# Altium PCB BASE.PcbDoc (part 4 of 5)
Units mil, origin at the board's own origin, x right, y up, seen from the top; angles counter-clockwise.
Board outline 4330.71 x 3937.01 mil, 6 copper layers (Top, GND1, SIG1, PWR, GND2, Bottom), stack 32.112 mil thick; 57 components, 250 nets, 665 pads, 350 vias.
Unrouted connection lines stored in the file: 2.
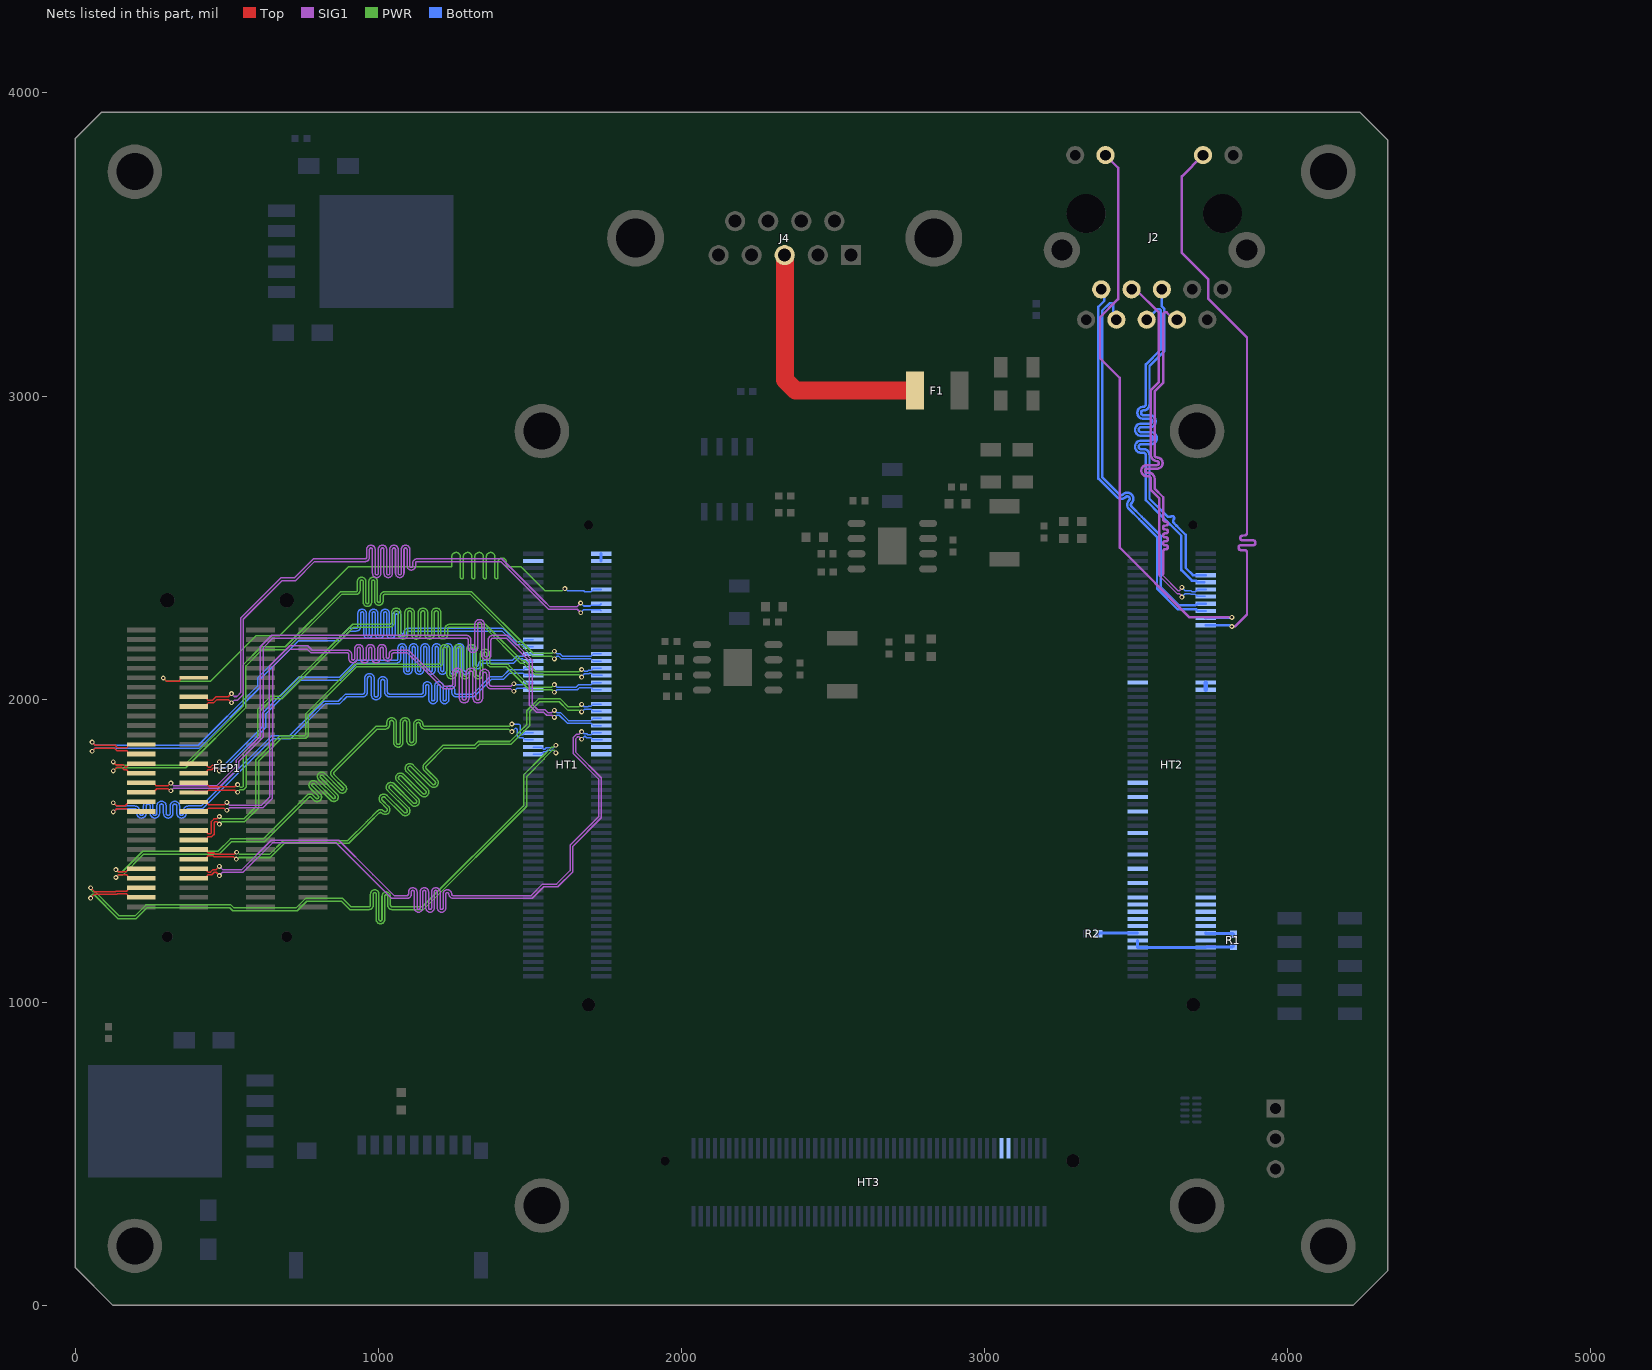
[diagram p8: the nets of this part, all layers, seen from the top]

## Via types
v1: diameter 16, hole 8, Top to Bottom, 219 vias
v2: diameter 30, hole 15, Top to Bottom, 75 vias
v3: diameter 22, hole 12, Top to Bottom, 48 vias
v4: diameter 28, hole 14, Top to Bottom, 3 vias
v5: diameter 39.37, hole 39.37, Top to Bottom, 2 vias
v6: diameter 24, hole 12, Top to Bottom, 2 vias
v7: diameter 40, hole 20, Top to Bottom, 1 vias

## Nets (pads, with @x,y where several pads share a name; then routed paths per layer and width w, separated by ;. In a path a pad name is that pad's centre, name@x,y a point inside that pad or via, vN(x,y) a via of type N, cw(c..) or ccw(c..) an arc to the next point about the centre after c; other vN are vias at no path point) (continued)
B13_L10_P: FEP1.C6 HT1.B55 | length 2432.9
  Top w5: v1(290.71,2070) 301.21,2059.5 335.22,2059.5 335.34,2059.62 343.21,2059.62 346.14,2062.55 346.14,2066.87 350.14,2070.87 FEP1.C6@390.71,2070.87
  PWR w5: v1(290.71,2070) 301.21,2059.5 354.31,2059.5 446.77,2059.5 595.9,2208.63 673.47,2208.63 901.16,2436.32 1230.71,2436.32 1237.71,2436.32 ccw(c1237.71,2441.32) 1242.71,2441.32 1242.71,2470.32 cw(c1256.71,2470.32) 1270.71,2470.32 1270.71,2402.32 ccw(c1275.71,2402.32) 1280.71,2402.32 1280.71,2470.32 cw(c1294.71,2470.32) 1308.71,2470.32 1308.71,2402.32 ccw(c1313.71,2402.32) 1318.71,2402.32 1318.71,2470.32 cw(c1332.71,2470.32) 1346.71,2470.32 1346.71,2402.32 ccw(c1351.71,2402.32) 1356.71,2402.32 1356.71,2470.32 cw(c1370.71,2470.32) 1384.71,2470.32 1384.71,2402.32 ccw(c1389.71,2402.32) 1394.71,2402.32 1394.71,2451.67 cw(c1408.71,2451.67) 1422.71,2451.67 1422.71,2441.32 ccw(c1427.71,2441.32) 1427.71,2436.32 1452.49,2436.32 1471.39,2436.32 1550.46,2357.25 1606.27,2357.25 1614.02,2365 v1(1615.71,2365)
  Bottom w5: v1(1615.71,2365) 1617.3,2365 1624.14,2358.17 1677.6,2358.17 1681.1,2354.66 1701.23,2354.66 1708.54,2361.97 HT1.B55@1735.12,2361.97
B13_L11_N: FEP1.D14 HT1.A47 | length 2434.1
  Top w5: v1(55.71,1828.35) 66.21,1838.85 128.6,1838.85 136.9,1830.55 169.81,1830.55 172.74,1827.62 172.74,1824.27 178.11,1818.9 FEP1.D14@217.48,1818.9
  Bottom w5: v1(55.71,1828.35) 66.21,1838.85 409.94,1838.85 610.71,2039.62 610.71,2066.42 737.07,2192.79 873.88,2192.79 906.09,2225 920.56,2225 927.56,2225 ccw(c927.56,2239) 941.56,2239 941.56,2283 cw(c946.56,2283) 951.56,2283 951.56,2214.64 ccw(c965.56,2214.64) 979.56,2214.64 979.56,2283 cw(c984.56,2283) 989.56,2283 989.56,2214.64 ccw(c1003.56,2214.64) 1017.56,2214.64 1017.56,2283 cw(c1022.56,2283) 1027.56,2283 1027.56,2214.64 ccw(c1041.56,2214.64) 1055.56,2214.64 1055.56,2276.22 cw(c1060.56,2276.22) 1065.56,2276.22 1065.56,2220 ccw(c1079.56,2220) 1093.56,2220 cw(c1098.56,2220) 1098.56,2225 1115.47,2225 1407.98,2225 1452.68,2180.3 1476.82,2180.3 1484.13,2172.99 HT1.A47@1510.71,2172.99
B13_L11_P: FEP1.D13 HT1.A48 | length 2434.1
  Top w5: v1(55.71,1858.35) 66.21,1847.85 132.33,1847.85 140.63,1839.55 169.81,1839.55 172.74,1842.48 172.74,1846.39 176.74,1850.39 FEP1.D13@217.48,1850.39
  Bottom w5: v1(55.71,1858.35) 66.21,1847.85 406.21,1847.85 601.71,2043.35 601.71,2070.15 733.34,2201.79 870.15,2201.79 902.36,2234 920.56,2234 927.56,2234 ccw(c927.56,2239) 932.56,2239 932.56,2283 cw(c946.56,2283) 960.56,2283 960.56,2214.64 ccw(c965.56,2214.64) 970.56,2214.64 970.56,2283 cw(c984.56,2283) 998.56,2283 998.56,2214.64 ccw(c1003.56,2214.64) 1008.56,2214.64 1008.56,2283 cw(c1022.56,2283) 1036.56,2283 1036.56,2214.64 ccw(c1041.56,2214.64) 1046.56,2214.64 1046.56,2276.22 cw(c1060.56,2276.22) 1074.56,2276.22 1074.56,2220 ccw(c1079.56,2220) 1084.56,2220 cw(c1098.56,2220) 1098.56,2234 1115.47,2234 1411.71,2234 1432.67,2213.04 1435.71,2210 1456.41,2189.3 1476.82,2189.3 1484.13,2196.61 HT1.A48@1510.71,2196.61
B13_L12_N: FEP1.D18 HT1.B36 | length 2433
  Top w5: FEP1.D18@217.48,1692.91 256.85,1692.91 268.9,1704.96 305.92,1704.96 312.73,1698.15 v1(315.71,1698.15)
  SIG1 w5: v1(315.71,1698.15) 316.14,1698.15 324.14,1706.15 471.44,1706.15 539.71,1774.42 539.71,1794.42 619.71,1874.42 619.71,2169.42 652.07,2201.79 1216.05,2201.79 1290.09,2201.79 cw(c1290.09,2195.29) 1296.59,2195.29 1296.59,2169.79 ccw(c1312.09,2169.79) 1327.59,2169.79 1327.59,2247.48 cw(c1334.09,2247.48) 1340.59,2247.48 1340.59,2146.11 ccw(c1356.09,2146.11) 1371.59,2146.11 1371.59,2195.29 cw(c1378.09,2195.29) 1378.09,2201.79 1385.09,2201.79 1422.07,2201.79 1456.78,2167.08 1498.11,2125.75 1498.11,1980.75 1522.42,1956.44 1545.88,1956.44 1555.4,1946.91 1572.47,1946.91 1579.46,1939.92 v1(1580.9,1939.92)
  Bottom w5: v1(1580.9,1939.92) 1582.09,1939.92 1589.33,1947.15 1596.98,1947.15 1623.68,1920.46 1701.23,1920.46 1708.54,1913.15 HT1.B36@1735.12,1913.15
B13_L12_P: FEP1.D17 HT1.B37 | length 2432.5
  Top w5: FEP1.D17@217.48,1724.41 256.85,1724.41 266.19,1715.07 275.28,1715.07 275.36,1715.15 307.28,1715.15 315.28,1723.15 v1(315.71,1723.15)
  SIG1 w5: v1(315.71,1723.15) 316.14,1723.15 324.14,1715.15 467.71,1715.15 530.71,1778.15 530.71,1798.15 610.71,1878.15 610.71,2173.15 648.34,2210.79 1216.05,2210.79 1290.09,2210.79 cw(c1290.09,2195.29) 1305.59,2195.29 1305.59,2169.79 ccw(c1312.09,2169.79) 1318.59,2169.79 1318.59,2247.48 cw(c1334.09,2247.48) 1349.59,2247.48 1349.59,2146.11 ccw(c1356.09,2146.11) 1362.59,2146.11 1362.59,2195.29 cw(c1378.09,2195.29) 1378.09,2210.79 1385.09,2210.79 1425.8,2210.79 1507.11,2129.48 1507.11,1984.48 1526.15,1965.44 1549.6,1965.44 1559.13,1955.91 1572.28,1955.91 1579.51,1963.15 v1(1580.71,1963.15)
  Bottom w5: v1(1580.71,1963.15) 1582.14,1963.15 1589.14,1956.15 1600.71,1956.15 1627.4,1929.46 1701.23,1929.46 1708.54,1936.77 HT1.B37@1735.12,1936.77
B13_L13_N: FEP1.D16 HT1.B45 | length 2434.8
  Top w5: v1(125.71,1763.35) 133.57,1771.21 133.57,1771.88 136.5,1774.81 154.28,1774.81 161.94,1767.15 169.81,1767.15 172.74,1764.22 172.74,1761.28 178.11,1755.91 FEP1.D16@217.48,1755.91
  PWR w5: v1(125.71,1763.35) 136.21,1773.85 364.44,1773.85 563.27,1972.68 563.27,2109.84 617.22,2163.79 696.91,2163.79 878.74,2345.62 918.97,2345.62 925.97,2345.62 ccw(c925.97,2359.62) 939.97,2359.62 939.97,2388.3 cw(c944.97,2388.3) 949.97,2388.3 949.97,2320.3 ccw(c963.97,2320.3) 977.97,2320.3 977.97,2388.3 cw(c982.97,2388.3) 987.97,2388.3 987.97,2324.08 ccw(c1001.97,2324.08) 1015.97,2324.08 1015.97,2340.62 cw(c1020.97,2340.62) 1020.97,2345.62 1129.97,2345.62 1303.9,2345.62 1508.37,2141.15 1572.28,2141.15 1580.28,2133.15 v1(1580.71,2133.15)
  Bottom w5: v1(1580.71,2133.15) 1581.14,2133.15 1589.14,2141.15 1595.97,2141.15 1604.06,2133.06 1701.23,2133.06 1708.54,2125.75 HT1.B45@1735.12,2125.75
B13_L13_P: FEP1.D15 HT1.B46 | length 2433.4
  Top w5: v1(125.71,1793.35) 125.71,1792.04 133.95,1783.81 158.01,1783.81 165.67,1776.15 169.81,1776.15 172.74,1779.08 172.74,1782.03 178.11,1787.4 FEP1.D15@217.48,1787.4
  PWR w5: v1(125.71,1793.35) 136.21,1782.85 360.71,1782.85 553.92,1976.06 553.92,2113.21 613.5,2172.79 693.19,2172.79 875.01,2354.62 918.97,2354.62 925.97,2354.62 ccw(c925.97,2359.62) 930.97,2359.62 930.97,2388.3 cw(c944.97,2388.3) 958.97,2388.3 958.97,2320.3 ccw(c963.97,2320.3) 968.97,2320.3 968.97,2388.3 cw(c982.97,2388.3) 996.97,2388.3 996.97,2324.08 ccw(c1001.97,2324.08) 1006.97,2324.08 1006.97,2340.62 cw(c1020.97,2340.62) 1020.97,2354.62 1129.97,2354.62 1307.63,2354.62 1510.92,2151.33 1572.28,2151.33 1579.1,2158.15 v1(1580.71,2158.15)
  Bottom w5: v1(1580.71,2158.15) 1581.14,2158.15 1589.14,2150.15 1599.7,2150.15 1607.79,2142.06 1701.23,2142.06 1708.54,2149.37 HT1.B46@1735.12,2149.37
B13_L14_N: FEP1.C16 HT1.A45 | length 2434.5
  Top w5: FEP1.C16@390.71,1755.91 430.08,1755.91 435.45,1761.28 435.45,1764.22 438.38,1767.15 450.33,1767.15 457.02,1773.85 465.21,1773.85 v1(475.71,1763.35)
  Bottom w5: v1(475.71,1763.35) 486.21,1773.85 495.69,1773.85 628.08,1906.24 628.08,1950.72 740.71,2063.35 875.71,2063.35 931.21,2118.85 1052.35,2118.85 1059.35,2118.85 ccw(c1059.35,2132.85) 1073.35,2132.85 1073.35,2169.09 cw(c1078.35,2169.09) 1083.35,2169.09 1083.35,2096.36 ccw(c1097.35,2096.36) 1111.35,2096.36 1111.35,2169.09 cw(c1116.35,2169.09) 1121.35,2169.09 1121.35,2096.36 ccw(c1135.35,2096.36) 1149.35,2096.36 1149.35,2169.09 cw(c1154.35,2169.09) 1159.35,2169.09 1159.35,2096.36 ccw(c1173.35,2096.36) 1187.35,2096.36 1187.35,2169.09 cw(c1192.35,2169.09) 1197.35,2169.09 1197.35,2096.36 ccw(c1211.35,2096.36) 1225.35,2096.36 1225.35,2169.09 cw(c1230.35,2169.09) 1235.35,2169.09 1235.35,2096.36 ccw(c1249.35,2096.36) 1263.35,2096.36 1263.35,2169.09 cw(c1268.35,2169.09) 1273.35,2169.09 1273.35,2096.36 ccw(c1287.35,2096.36) 1301.35,2096.36 1301.35,2165 cw(c1306.35,2165) 1311.35,2165 1311.35,2113.85 ccw(c1325.35,2113.85) 1339.35,2113.85 cw(c1344.35,2113.85) 1344.35,2118.85 1366.29,2118.85 1445.91,2118.85 1460.12,2133.06 1476.82,2133.06 1484.13,2125.75 HT1.A45@1510.71,2125.75
B13_L14_P: FEP1.C15 HT1.A46 | length 2434.5
  Top w5: FEP1.C15@390.71,1787.4 430.08,1787.4 435.45,1782.03 435.45,1779.08 438.38,1776.15 446.6,1776.15 453.29,1782.85 465.21,1782.85 v1(475.71,1793.35)
  Bottom w5: v1(475.71,1793.35) 486.21,1782.85 491.96,1782.85 619.08,1909.97 619.08,1954.45 736.98,2072.35 871.98,2072.35 927.48,2127.85 1052.35,2127.85 1059.35,2127.85 ccw(c1059.35,2132.85) 1064.35,2132.85 1064.35,2169.09 cw(c1078.35,2169.09) 1092.35,2169.09 1092.35,2096.36 ccw(c1097.35,2096.36) 1102.35,2096.36 1102.35,2169.09 cw(c1116.35,2169.09) 1130.35,2169.09 1130.35,2096.36 ccw(c1135.35,2096.36) 1140.35,2096.36 1140.35,2169.09 cw(c1154.35,2169.09) 1168.35,2169.09 1168.35,2096.36 ccw(c1173.35,2096.36) 1178.35,2096.36 1178.35,2169.09 cw(c1192.35,2169.09) 1206.35,2169.09 1206.35,2096.36 ccw(c1211.35,2096.36) 1216.35,2096.36 1216.35,2169.09 cw(c1230.35,2169.09) 1244.35,2169.09 1244.35,2096.36 ccw(c1249.35,2096.36) 1254.35,2096.36 1254.35,2169.09 cw(c1268.35,2169.09) 1282.35,2169.09 1282.35,2096.36 ccw(c1287.35,2096.36) 1292.35,2096.36 1292.35,2165 cw(c1306.35,2165) 1320.35,2165 1320.35,2113.85 ccw(c1325.35,2113.85) 1330.35,2113.85 cw(c1344.35,2113.85) 1344.35,2127.85 1366.29,2127.85 1442.18,2127.85 1456.39,2142.06 1476.82,2142.06 1484.13,2149.37 HT1.A46@1510.71,2149.37
B13_L15_N: FEP1.D27 HT1.A34 | length 2434.1
  Top w5: v1(134.15,1411.95) 134.15,1412.01 142.58,1420.44 165.4,1420.44 165.67,1420.7 169.81,1420.7 172.74,1417.77 172.74,1414.82 178.11,1409.45 FEP1.D27@217.48,1409.45
  PWR w5: v1(134.15,1411.95) 134.15,1412.01 142.58,1420.44 157.68,1420.44 226.48,1489.23 474.94,1489.23 515.71,1530 624.78,1530 756.26,1661.48 ; 756.28,1661.5 771.11,1676.32 ; 771.11,1676.33 cw(c774.66,1672.82) 778.2,1676.33 ; 778.21,1676.32 787.96,1666.58 ccw(c798.23,1676.85) 808.5,1666.58 ccw(c798.23,1676.85) 808.48,1687.15 782.25,1713.38 ; 782.24,1713.39 cw(c785.76,1716.93) 789.32,1720.43 ; 789.33,1720.42 842.9,1666.85 ccw(c853.17,1677.12) 864.84,1685.78 864.84,1686 809.86,1740.98 ; 809.82,1748.05 ccw(c813.36,1744.53) 809.85,1740.99 ; 809.85,1748.07 cw(c813.36,1744.53) 816.92,1748.03 ; 816.94,1748.02 870.5,1694.46 ccw(c880.77,1704.73) 892.44,1713.38 892.44,1713.6 853.96,1752.08 cw(c857.47,1755.63) 853.94,1759.16 ; 853.97,1759.19 996.13,1901.35 1014.85,1901.35 1021.85,1901.35 ccw(c1021.85,1916.85) 1037.35,1916.85 1037.35,1923.52 cw(c1043.85,1923.52) 1050.35,1923.52 1050.35,1857.4 ccw(c1065.85,1857.4) 1081.35,1857.4 1081.35,1923.52 cw(c1087.85,1923.52) 1094.35,1923.52 1094.35,1863.42 ccw(c1109.85,1863.42) 1125.35,1863.42 1125.35,1916.85 cw(c1131.85,1916.85) 1138.35,1916.85 ccw(c1153.85,1916.85) 1153.85,1901.35 1190.84,1901.35 1429.73,1901.35 1437.73,1893.35 v1(1440.71,1893.35)
  Bottom w5: v1(1440.71,1893.35) 1451.11,1903.75 1455.26,1903.75 1458.18,1900.82 1458.18,1879.44 1464.41,1873.22 1476.82,1873.22 1484.13,1865.91 HT1.A34@1510.71,1865.91
B13_L15_P: FEP1.D26 HT1.A35 | length 2433.6
  Top w5: v1(134.29,1437.92) 135.32,1437.92 142.72,1430.51 167.68,1430.51 178.11,1440.94 FEP1.D26@217.48,1440.94
  PWR w5: v1(134.29,1437.92) 134.29,1437.86 142.72,1429.44 153.95,1429.44 222.75,1498.23 471.21,1498.23 511.98,1539 620.3,1539 708.57,1627.28 ; 708.6,1627.28 727.87,1646.54 728.03,1646.54 741.1,1659.61 741.1,1659.8 749.52,1668.22 ; 749.54,1668.24 764.37,1683.07 cw(c774.66,1672.82) 784.95,1683.07 794.68,1673.35 ; 794.69,1673.34 ccw(c798.23,1676.85) 801.74,1673.3 801.78,1673.34 ccw(c798.23,1676.85) 801.76,1680.38 ; 801.73,1680.41 775.49,1706.66 cw(c785.76,1716.93) 794.41,1728.6 794.64,1728.6 849.61,1673.62 ccw(c853.17,1677.12) 856.67,1680.68 803.09,1734.26 cw(c813.36,1744.53) 803.09,1754.81 cw(c813.36,1744.53) 822.02,1756.2 822.24,1756.2 877.22,1701.22 ccw(c880.77,1704.73) 884.27,1708.29 847.22,1745.34 cw(c857.47,1755.63) 847.22,1765.92 942.43,1861.13 ; 942.45,1861.13 991.67,1910.35 1014.85,1910.35 1021.85,1910.35 ccw(c1021.85,1916.85) 1028.35,1916.85 1028.35,1923.52 cw(c1043.85,1923.52) 1059.35,1923.52 1059.35,1857.4 ccw(c1065.85,1857.4) 1072.35,1857.4 1072.35,1923.52 cw(c1087.85,1923.52) 1103.35,1923.52 1103.35,1863.42 ccw(c1109.85,1863.42) 1116.35,1863.42 1116.35,1916.85 cw(c1131.85,1916.85) 1147.35,1916.85 ccw(c1153.85,1916.85) 1153.85,1910.35 1190.84,1910.35 1432.28,1910.35 1440.28,1918.35 v1(1440.71,1918.35)
  Bottom w5: v1(1440.71,1918.35) 1442.33,1916.73 1465.32,1916.73 1468.25,1913.8 1468.25,1885.15 1471.18,1882.22 1476.82,1882.22 1484.13,1889.53 HT1.A35@1510.71,1889.53
B13_L16_N: FEP1.C20 HT1.A41 | length 2434
  Top w5: FEP1.C20@390.71,1629.92 430.08,1629.92 435.45,1635.3 435.45,1636.77 438.38,1639.7 492.01,1639.7 498.15,1633.56 v1(500.44,1633.56)
  SIG1 w5: v1(500.44,1633.56) 508.87,1642.01 619.44,1642.01 650.14,1672.71 650.14,1840.83 650.96,1841.65 650.96,2106.67 709.86,2165.58 765.13,2165.58 778.04,2152.66 871.8,2152.66 897.8,2152.66 cw(c897.8,2147.66) 902.8,2147.66 902.8,2134.17 ccw(c916.8,2134.17) 930.8,2134.17 930.8,2166.25 cw(c935.8,2166.25) 940.8,2166.25 940.8,2134.17 ccw(c954.8,2134.17) 968.8,2134.17 968.8,2166.25 cw(c973.8,2166.25) 978.8,2166.25 978.8,2134.17 ccw(c992.8,2134.17) 1006.8,2134.17 1006.8,2166.25 cw(c1011.8,2166.25) 1016.8,2166.25 1016.8,2140.01 ccw(c1030.8,2140.01) 1044.8,2140.01 1044.8,2147.66 cw(c1049.8,2147.66) 1049.8,2152.66 1096.19,2152.66 1116.66,2132.2 1119.57,2129.29 1171.78,2077.08 1214.71,2034.15 1231.41,2034.15 1238.6,2034.15 ccw(c1238.6,2050.02) 1254.47,2050.02 1254.47,2086.67 cw(c1260.97,2086.67) 1267.47,2086.67 1267.47,2003.83 ccw(c1283.34,2003.83) 1299.21,2003.83 1299.21,2086.67 cw(c1305.71,2086.67) 1312.21,2086.67 1312.21,2003.83 ccw(c1328.08,2003.83) 1343.95,2003.83 1343.95,2082.9 cw(c1350.45,2082.9) 1356.95,2082.9 1356.95,2050.02 ccw(c1372.82,2050.02) 1372.82,2034.15 1421.62,2034.15 1437.48,2034.15 1445.48,2026.15 v1(1447.28,2026.15)
  Bottom w5: v1(1447.28,2026.15) 1447.45,2026.15 1457.74,2036.44 1476.81,2036.44 1477.6,2035.65 1506.32,2035.65 HT1.A41@1510.71,2031.26
B13_L16_P: FEP1.C19 HT1.A42 | length 2433.1
  Top w5: FEP1.C19@390.71,1661.42 431.45,1661.42 440.64,1652.23 492.21,1652.23 499.44,1659.46 v1(500.64,1659.46)
  SIG1 w5: v1(500.64,1659.46) 509.07,1651.01 615.71,1651.01 641.14,1676.44 641.14,1844.55 640.32,1845.37 640.32,2108.76 707.61,2176.05 767.39,2176.05 781.77,2161.66 871.8,2161.66 897.8,2161.66 cw(c897.8,2147.66) 911.8,2147.66 911.8,2134.17 ccw(c916.8,2134.17) 921.8,2134.17 921.8,2166.25 cw(c935.8,2166.25) 949.8,2166.25 949.8,2134.17 ccw(c954.8,2134.17) 959.8,2134.17 959.8,2166.25 cw(c973.8,2166.25) 987.8,2166.25 987.8,2134.17 ccw(c992.8,2134.17) 997.8,2134.17 997.8,2166.25 cw(c1011.8,2166.25) 1025.8,2166.25 1025.8,2140.01 ccw(c1030.8,2140.01) 1035.8,2140.01 1035.8,2147.66 cw(c1049.8,2147.66) 1049.8,2161.66 1099.92,2161.66 1119.57,2142.02 1218.07,2043.52 1231.41,2043.52 1238.6,2043.52 ccw(c1238.6,2050.02) 1245.1,2050.02 1245.1,2086.67 cw(c1260.97,2086.67) 1276.84,2086.67 1276.84,2003.83 ccw(c1283.34,2003.83) 1289.84,2003.83 1289.84,2086.67 cw(c1305.71,2086.67) 1321.58,2086.67 1321.58,2003.83 ccw(c1328.08,2003.83) 1334.58,2003.83 1334.58,2082.9 cw(c1350.45,2082.9) 1366.32,2082.9 1366.32,2050.02 ccw(c1372.82,2050.02) 1372.82,2043.52 1421.62,2043.52 1438.85,2043.52 1446.48,2051.15 v1(1447.28,2051.15)
  Bottom w5: v1(1447.28,2051.15) 1450.26,2051.15 1453.83,2047.57 1476.82,2047.57 1484.13,2054.88 HT1.A42@1510.71,2054.88
B13_L17_N: FEP1.D20 HT1.A43 | length 2431.8
  Top w5: v1(125.71,1628.35) 126.29,1628.35 136.95,1639.01 169.02,1639.01 178.11,1629.92 FEP1.D20@217.48,1629.92
  Bottom w5: v1(125.71,1628.35) 136.21,1638.85 196.71,1638.85 cw(c196.71,1632.35) 203.21,1632.35 203.21,1623.44 ccw(c218.71,1623.44) 234.21,1623.44 234.21,1647.86 cw(c240.71,1647.86) 247.21,1647.86 247.21,1623.44 ccw(c262.71,1623.44) 278.21,1623.44 278.21,1647.86 cw(c284.71,1647.86) 291.21,1647.86 291.21,1623.44 ccw(c306.71,1623.44) 322.21,1623.44 322.21,1647.86 cw(c328.71,1647.86) 335.21,1647.86 335.21,1623.44 ccw(c350.71,1623.44) 366.21,1623.44 366.21,1632.35 cw(c372.71,1632.35) 372.71,1638.85 419.94,1638.85 505.71,1724.62 650.88,1869.79 709.85,1869.79 824.32,1984.26 871.82,1984.26 895.71,2008.15 948.73,2008.15 ccw(c948.73,2023.65) 964.23,2023.65 964.23,2069.04 cw(c970.73,2069.04) 977.23,2069.04 977.23,2013.75 ccw(c992.73,2013.75) 1008.23,2013.75 1008.23,2058.82 cw(c1014.73,2058.82) 1021.23,2058.82 1021.23,2023.65 ccw(c1036.73,2023.65) 1036.73,2008.15 1142.71,2008.15 ccw(c1142.71,2022.15) 1156.71,2022.15 1156.71,2043.27 cw(c1161.71,2043.27) 1166.71,2043.27 1166.71,1999.27 ccw(c1180.71,1999.27) 1194.71,1999.27 1194.71,2043.27 cw(c1199.71,2043.27) 1204.71,2043.27 1204.71,1999.27 ccw(c1218.71,1999.27) 1232.71,1999.27 1232.71,2030.57 cw(c1237.71,2030.57) 1242.71,2030.57 1242.71,2022.15 ccw(c1256.71,2022.15) 1256.71,2008.15 1315.71,2008.15 1373.27,2065.71 1413.07,2065.71 1433.72,2086.36 1476.28,2086.36 1484.13,2078.5 HT1.A43@1510.71,2078.5
B13_L17_P: FEP1.D19 HT1.A44 | length 2432.6
  Top w5: v1(125.71,1658.35) 126.07,1658.35 135.93,1648.49 165.18,1648.49 178.11,1661.42 FEP1.D19@217.48,1661.42
  Bottom w5: v1(125.71,1658.35) 136.21,1647.85 196.71,1647.85 cw(c196.71,1632.35) 212.21,1632.35 212.21,1623.44 ccw(c218.71,1623.44) 225.21,1623.44 225.21,1647.86 cw(c240.71,1647.86) 256.21,1647.86 256.21,1623.44 ccw(c262.71,1623.44) 269.21,1623.44 269.21,1647.86 cw(c284.71,1647.86) 300.21,1647.86 300.21,1623.44 ccw(c306.71,1623.44) 313.21,1623.44 313.21,1647.86 cw(c328.71,1647.86) 344.21,1647.86 344.21,1623.44 ccw(c350.71,1623.44) 357.21,1623.44 357.21,1632.35 cw(c372.71,1632.35) 372.71,1647.85 416.21,1647.85 422.54,1654.18 496.71,1728.35 647.41,1879.04 706.38,1879.04 820.59,1993.26 868.09,1993.26 891.98,2017.15 948.73,2017.15 ccw(c948.73,2023.65) 955.23,2023.65 955.23,2069.04 cw(c970.73,2069.04) 986.23,2069.04 986.23,2013.75 ccw(c992.73,2013.75) 999.23,2013.75 999.23,2058.82 cw(c1014.73,2058.82) 1030.23,2058.82 1030.23,2023.65 ccw(c1036.73,2023.65) 1036.73,2017.15 1142.71,2017.15 ccw(c1142.71,2022.15) 1147.71,2022.15 1147.71,2043.27 cw(c1161.71,2043.27) 1175.71,2043.27 1175.71,1999.27 ccw(c1180.71,1999.27) 1185.71,1999.27 1185.71,2043.27 cw(c1199.71,2043.27) 1213.71,2043.27 1213.71,1999.27 ccw(c1218.71,1999.27) 1223.71,1999.27 1223.71,2030.57 cw(c1237.71,2030.57) 1251.71,2030.57 1251.71,2022.15 ccw(c1256.71,2022.15) 1256.71,2017.15 1311.98,2017.15 1369.54,2074.71 1409.34,2074.71 1431.69,2097.06 1476.81,2097.06 1477.49,2097.74 1479.74,2097.74 1484.13,2102.13 HT1.A44@1510.71,2102.13
B13_L18_N: FEP1.D29 HT1.A32 | length 2425.8
  Top w5: v1(50.71,1343.79) 63.39,1356.47 137.98,1356.47 139.21,1357.7 169.81,1357.7 172.74,1354.78 172.74,1351.83 178.11,1346.46 FEP1.D29@217.48,1346.46
  PWR w5: v1(50.71,1343.79) 52.81,1345.9 52.81,1352.06 57.22,1356.47 61.36,1356.47 141.69,1276.15 200.94,1276.15 237.11,1312.32 510.05,1312.32 520,1302.36 732.36,1302.36 763.64,1333.64 878.64,1333.64 906.04,1306.24 962.16,1306.24 969.16,1306.24 ccw(c969.16,1320.24) 983.16,1320.24 983.16,1357.24 cw(c988.16,1357.24) 993.16,1357.24 993.16,1273.24 ccw(c1007.16,1273.24) 1021.16,1273.24 1021.16,1350.14 cw(c1026.16,1350.14) 1031.16,1350.14 1031.16,1320.24 ccw(c1045.16,1320.24) 1045.16,1306.24 1118.74,1306.24 1148.8,1306.24 1489.38,1646.82 1489.38,1745.15 1546.95,1802.72 1546.95,1804.05 1574.99,1832.09 1580.06,1832.09 1581.01,1831.15
  Bottom w5: HT1.A32@1510.71,1818.66 1537.28,1818.66 1544.59,1825.97 1552.47,1825.97 1557.4,1830.9 1577.53,1830.9 1585.28,1823.15 v1(1585.71,1823.15)
B13_L18_P: FEP1.D28 HT1.A33 | length 2434.2
  Top w5: v1(50.71,1378.15) 63.39,1365.47 134.25,1365.47 135.48,1366.7 169.81,1366.7 172.74,1369.63 172.74,1372.58 178.11,1377.95 FEP1.D28@217.48,1377.95
  PWR w5: v1(50.71,1378.15) 52.81,1376.04 52.81,1369.88 57.22,1365.47 65.09,1365.47 116.56,1314 145.41,1285.15 197.22,1285.15 233.39,1321.32 513.77,1321.32 523.73,1311.36 728.64,1311.36 759.91,1342.64 882.36,1342.64 909.76,1315.24 962.16,1315.24 969.16,1315.24 ccw(c969.16,1320.24) 974.16,1320.24 974.16,1357.24 cw(c988.16,1357.24) 1002.16,1357.24 1002.16,1273.24 ccw(c1007.16,1273.24) 1012.16,1273.24 1012.16,1350.14 cw(c1026.16,1350.14) 1040.16,1350.14 1040.16,1320.24 ccw(c1045.16,1320.24) 1045.16,1315.24 1118.74,1315.24 1145.07,1315.24 1480.38,1650.55 1480.38,1751.55 1539.25,1810.42 1540.58,1810.42 1571.26,1841.09 1577.28,1841.09 1584.34,1848.15 v1(1585.71,1848.15)
  Bottom w5: HT1.A33@1510.71,1842.28 1537.28,1842.28 1544.59,1834.97 1548.74,1834.97 1553.67,1839.9 1577.28,1839.9 1585.28,1847.9 1585.28,1848.15 v1(1585.71,1848.15)
B13_L19_N: FEP1.C23 HT1.B41 | length 2434
  Top w5: FEP1.C23@390.71,1535.43 430.08,1535.43 435.45,1540.81 435.45,1543.75 438.38,1546.68 450.33,1546.68 458.53,1554.88 458.53,1593.22 461.46,1596.15 467.28,1596.15 475.28,1588.15 v1(475.71,1588.15)
  PWR w5: v1(475.71,1588.15) 476.14,1588.15 484.14,1596.15 559.59,1596.15 605.33,1641.89 605.33,1691.51 605.33,1743.22 605.02,1743.53 605.02,1795.7 680.37,1871.05 760.71,1871.05 768.91,1879.26 768.91,1947.79 927.91,2106.79 1190.79,2106.79 1197.79,2106.79 ccw(c1197.79,2122.29) 1213.29,2122.29 1213.29,2164.75 cw(c1219.79,2164.75) 1226.29,2164.75 1226.29,2082.65 ccw(c1241.79,2082.65) 1257.29,2082.65 1257.29,2164.75 cw(c1263.79,2164.75) 1270.29,2164.75 1270.29,2082.65 ccw(c1285.79,2082.65) 1301.29,2082.65 1301.29,2164.75 cw(c1307.79,2164.75) 1314.29,2164.75 1314.29,2082.65 ccw(c1329.79,2082.65) 1345.29,2082.65 1345.29,2149.43 cw(c1351.79,2149.43) 1358.29,2149.43 1358.29,2122.29 ccw(c1373.79,2122.29) 1373.79,2106.79 1419.94,2106.79 1422.03,2106.79 1497.67,2031.15 1572.28,2031.15 1580.28,2023.15 v1(1580.71,2023.15)
  Bottom w5: v1(1580.71,2023.15) 1581.14,2023.15 1589.14,2031.15 1656.51,2031.15 1663.93,2038.57 1701.23,2038.57 1708.54,2031.26 HT1.B41@1735.12,2031.26
B13_L19_P: FEP1.C22 HT1.B42 | length 2434.5
  Top w5: FEP1.C22@390.71,1566.93 430.08,1566.93 435.45,1561.56 435.45,1558.61 438.38,1555.68 446.6,1555.68 449.53,1558.61 449.53,1596.95 457.73,1605.15 467.28,1605.15 475.28,1613.15 v1(475.71,1613.15)
  PWR w5: v1(475.71,1613.15) 476.14,1613.15 484.14,1605.15 555.86,1605.15 595.71,1645 595.71,1695.29 595.71,1746.95 596.02,1747.26 596.02,1799.43 676.64,1880.05 756.98,1880.05 759.91,1882.98 759.91,1951.51 924.18,2115.79 1190.79,2115.79 1197.79,2115.79 ccw(c1197.79,2122.29) 1204.29,2122.29 1204.29,2164.75 cw(c1219.79,2164.75) 1235.29,2164.75 1235.29,2082.65 ccw(c1241.79,2082.65) 1248.29,2082.65 1248.29,2164.75 cw(c1263.79,2164.75) 1279.29,2164.75 1279.29,2082.65 ccw(c1285.79,2082.65) 1292.29,2082.65 1292.29,2164.75 cw(c1307.79,2164.75) 1323.29,2164.75 1323.29,2082.65 ccw(c1329.79,2082.65) 1336.29,2082.65 1336.29,2149.43 cw(c1351.79,2149.43) 1367.29,2149.43 1367.29,2122.29 ccw(c1373.79,2122.29) 1373.79,2115.79 1419.94,2115.79 1427.39,2115.79 1432.73,2110.45 1432.73,2109.17 1501.75,2040.15 1572.28,2040.15 1580.28,2048.15 v1(1580.71,2048.15)
  Bottom w5: v1(1580.71,2048.15) 1581.14,2048.15 1589.14,2040.15 1652.78,2040.15 1660.2,2047.57 1701.23,2047.57 1708.54,2054.88 HT1.B42@1735.12,2054.88
B13_L20_N: FEP1.C25 HT1.B38 | length 2435.7
  Top w5: FEP1.C25@390.71,1472.44 430.08,1472.44 435.45,1477.81 435.45,1480.76 438.38,1483.69 454.46,1483.69 458.36,1479.78 523.06,1479.78 530.46,1472.38 v1(531.49,1472.38)
  PWR w5: v1(531.49,1472.38) 534.42,1472.38 539.92,1477.88 643.58,1477.88 689.86,1524.15 902.69,1524.15 902.69,1524.58 965.63,1587.53 966.95,1588.85 971.89,1593.78 1002.59,1624.49 cw(c1007.21,1619.92) 1011.8,1624.52 ; 1011.83,1624.49 ccw(c1022.77,1635.47) 1033.73,1624.51 ccw(c1022.77,1635.47) 1033.72,1646.44 1013.27,1666.9 cw(c1017.83,1671.52) 1013.22,1676.1 ; 1013.25,1676.14 cw(c1017.83,1671.52) 1022.44,1676.1 1078.03,1620.51 ccw(c1089.02,1631.45) 1099.98,1620.49 ccw(c1089.02,1631.45) 1099.96,1642.43 1037.07,1705.32 cw(c1041.65,1709.93) 1037.03,1714.51 ; 1037.07,1714.55 cw(c1041.65,1709.93) 1046.26,1714.51 1109.15,1651.63 ccw(c1120.13,1662.56) 1131.07,1673.54 1068.18,1736.43 ; 1068.18,1736.44 cw(c1072.76,1741.05) 1068.15,1745.63 ; 1068.18,1745.66 cw(c1072.76,1741.05) 1077.37,1745.63 1140.26,1682.74 ccw(c1151.25,1693.67) 1162.21,1682.71 ccw(c1151.25,1693.67) 1162.18,1704.66 1099.3,1767.54 cw(c1103.87,1772.16) 1099.26,1776.74 ; 1099.29,1776.77 cw(c1103.87,1772.16) 1108.48,1776.74 1171.37,1713.85 ccw(c1182.36,1724.78) 1193.3,1735.77 1158.2,1770.86 cw(c1162.78,1775.48) 1158.18,1780.07 ; 1158.21,1780.1 1163.13,1785.03 1217.01,1838.9 1320.74,1838.9 1333.37,1851.53 1437.82,1851.53 1494.71,1908.42 1498.81,1912.52 1498.81,1958.52 1532.07,1991.79 1596.89,1991.79 1624.46,1964.21 1662.28,1964.21 1668.34,1958.15 v1(1670.71,1958.15)
  Bottom w5: v1(1670.71,1958.15) 1671.14,1958.15 1679.14,1966.15 1695.53,1966.15 1697.08,1967.7 1701.23,1967.7 1708.54,1960.39 HT1.B38@1735.12,1960.39
B13_L20_P: FEP1.C24 HT1.B39 | length 2434.4
  Top w5: FEP1.C24@390.71,1503.94 430.08,1503.94 435.45,1498.56 435.45,1495.62 438.38,1492.69 458.18,1492.69 462.09,1488.78 523.94,1488.78 530.08,1494.93 v1(532.37,1494.93)
  PWR w5: v1(532.37,1494.93) 535.14,1494.93 540.8,1489.28 642.26,1489.28 686.13,1533.15 898.53,1533.15 960.59,1595.21 965.52,1600.15 ; 965.55,1600.17 996.23,1630.85 cw(c1007.21,1619.92) 1018.16,1630.89 ; 1018.18,1630.87 ccw(c1022.77,1635.47) 1027.35,1630.86 ; 1027.38,1630.89 ccw(c1022.77,1635.47) 1027.37,1640.07 ; 1027.35,1640.09 1006.87,1660.56 cw(c1017.83,1671.52) 1006.87,1682.48 cw(c1017.83,1671.52) 1028.82,1682.46 1084.4,1626.87 ccw(c1089.02,1631.45) 1093.6,1626.83 ; 1093.64,1626.87 ccw(c1089.02,1631.45) 1093.6,1636.06 1030.71,1698.95 cw(c1041.65,1709.93) 1030.69,1720.89 cw(c1041.65,1709.93) 1052.63,1720.87 1115.52,1657.98 ; 1115.53,1657.98 ccw(c1120.13,1662.56) 1124.71,1667.17 ; 1124.71,1667.18 1061.83,1730.06 cw(c1072.76,1741.05) 1061.8,1752.01 cw(c1072.76,1741.05) 1083.74,1751.98 1146.63,1689.1 ; 1146.64,1689.09 ccw(c1151.25,1693.67) 1155.83,1689.06 ; 1155.86,1689.09 ccw(c1151.25,1693.67) 1155.83,1698.28 1092.94,1761.17 cw(c1103.87,1772.16) 1092.91,1783.12 cw(c1103.87,1772.16) 1114.86,1783.1 1177.74,1720.21 ccw(c1182.36,1724.78) 1186.94,1729.4 ; 1186.93,1729.4 1151.84,1764.49 cw(c1162.78,1775.48) 1151.84,1786.46 1156.77,1791.39 1213.28,1847.9 1317.01,1847.9 1329.64,1860.53 1434.09,1860.53 1485.71,1912.15 1489.81,1916.25 1489.81,1962.25 1528.34,2000.79 1600.62,2000.79 1626.72,1974.69 1661.82,1974.69 1670.28,1983.15 v1(1670.71,1983.15)
  Bottom w5: v1(1670.71,1983.15) 1671.14,1983.15 1679.14,1975.15 1691.8,1975.15 1693.35,1976.7 1701.23,1976.7 1708.54,1984.02 HT1.B39@1735.12,1984.02
B13_L21_N: FEP1.C9 HT1.B52 | length 2434
  Top w5: FEP1.C9@390.71,1976.38 430.08,1976.38 435.45,1981.75 435.45,1984.7 438.38,1987.63 456.71,1987.63 467.93,1998.85 505.21,1998.85 v1(515.71,1988.35)
  SIG1 w5: v1(515.71,1988.35) 516.66,1988.35 524.14,1995.82 534.5,1995.82 554.68,2016.01 554.68,2053.97 ; 554.68,2250.03 554.68,2263.47 682.21,2391 726.71,2391 789.86,2454.15 949.71,2454.15 956.71,2454.15 ccw(c956.71,2468.15) 970.71,2468.15 970.71,2494.15 cw(c975.71,2494.15) 980.71,2494.15 980.71,2415.21 ccw(c994.71,2415.21) 1008.71,2415.21 1008.71,2494.15 cw(c1013.71,2494.15) 1018.71,2494.15 1018.71,2415.21 ccw(c1032.71,2415.21) 1046.71,2415.21 1046.71,2494.15 cw(c1051.71,2494.15) 1056.71,2494.15 1056.71,2415.21 ccw(c1070.71,2415.21) 1084.71,2415.21 1084.71,2494.15 cw(c1089.71,2494.15) 1094.71,2494.15 1094.71,2439.99 ccw(c1108.71,2439.99) 1122.71,2439.99 1122.71,2449.15 cw(c1127.71,2449.15) 1127.71,2454.15 1172.48,2454.15 1403.83,2454.15 1561.17,2296.81 1656.01,2296.81 1667.52,2285.3 v1(1667.78,2285.3) ; 554.72,2054.01 554.72,2250
  Bottom w5: v1(1667.78,2285.3) 1667.78,2285.56 1677.22,2295.01 1731.21,2295.01 HT1.B52@1735.12,2291.1
B13_L21_P: FEP1.C8 HT1.B53 | length 2432.3
  Top w5: FEP1.C8@390.71,2007.87 430.08,2007.87 435.45,2002.5 435.45,1999.56 438.38,1996.63 452.98,1996.63 464.2,2007.85 505.21,2007.85 v1(515.71,2018.35)
  SIG1 w5: v1(515.71,2018.35) 515.71,2017.43 524.14,2009 533.47,2009 545.68,2021.21 545.68,2057.7 ; 545.65,2057.74 545.65,2253.73 ; 545.68,2253.76 545.68,2267.2 678.48,2400 722.98,2400 786.13,2463.15 949.71,2463.15 956.71,2463.15 ccw(c956.71,2468.15) 961.71,2468.15 961.71,2494.15 cw(c975.71,2494.15) 989.71,2494.15 989.71,2415.21 ccw(c994.71,2415.21) 999.71,2415.21 999.71,2494.15 cw(c1013.71,2494.15) 1027.71,2494.15 1027.71,2415.21 ccw(c1032.71,2415.21) 1037.71,2415.21 1037.71,2494.15 cw(c1051.71,2494.15) 1065.71,2494.15 1065.71,2415.21 ccw(c1070.71,2415.21) 1075.71,2415.21 1075.71,2494.15 cw(c1089.71,2494.15) 1103.71,2494.15 1103.71,2439.99 ccw(c1108.71,2439.99) 1113.71,2439.99 1113.71,2449.15 cw(c1127.71,2449.15) 1127.71,2463.15 1172.48,2463.15 1407.56,2463.15 1547.67,2323.04 1564.9,2305.81 1656.01,2305.81 1667.26,2317.05 v1(1667.26,2317.31)
  Bottom w5: v1@1668.61,2316.22 1668.96,2316.22 1677.63,2307.55 1699.28,2307.55 1702.06,2310.33 1730.73,2310.33 HT1.B53@1735.12,2314.72
B13_L22_N: FEP1.C18 HT1.B43 | length 2437.2
  Top w5: FEP1.C18@390.71,1692.91 394.71,1696.91 437.55,1696.91 440.22,1699.58 526.3,1699.58 532.73,1693.15 v1(535.71,1693.15)
  PWR w5: v1(535.71,1693.15) 536.14,1693.15 544.14,1701.15 555.38,1701.15 563.58,1709.35 563.58,1818.29 610.71,1865.42 610.71,1962.27 649.78,2001.35 682.43,2001.35 919.24,2238.15 1030.21,2238.15 1037.21,2238.15 ccw(c1037.21,2253.65) 1052.71,2253.65 1052.71,2285.04 cw(c1059.21,2285.04) 1065.71,2285.04 1065.71,2213.91 ccw(c1081.21,2213.91) 1096.71,2213.91 1096.71,2285.04 cw(c1103.21,2285.04) 1109.71,2285.04 1109.71,2213.91 ccw(c1125.21,2213.91) 1140.71,2213.91 1140.71,2285.04 cw(c1147.21,2285.04) 1153.71,2285.04 1153.71,2213.91 ccw(c1169.21,2213.91) 1184.71,2213.91 1184.71,2285.04 cw(c1191.21,2285.04) 1197.71,2285.04 1197.71,2214.27 ccw(c1213.21,2214.27) 1228.71,2214.27 1228.71,2231.65 cw(c1235.21,2231.65) 1235.21,2238.15 1281.54,2238.15 1349.83,2238.15 1469.83,2118.15 1479,2118.15 1516.68,2080.48 1662.28,2080.48 1669.61,2073.15 v1(1670.71,2073.15)
  Bottom w5: v1(1670.71,2073.15) 1671.14,2073.15 1676.5,2078.51 1676.5,2080.9 1679.43,2083.83 1695.1,2083.83 1697.08,2085.81 1701.23,2085.81 1708.54,2078.5 HT1.B43@1735.12,2078.5 HT1.B43@1738.85,2078.5
B13_L22_P: FEP1.C17 HT1.B44 | length 2432.4
  Top w5: FEP1.C17@390.71,1724.41 430.08,1724.41 442.94,1711.55 526.36,1711.55 532.96,1718.15 v1(535.71,1718.15)
  PWR w5: v1(535.71,1718.15) 536.14,1718.15 544.14,1710.15 551.65,1710.15 554.58,1713.08 554.58,1822.02 601.71,1869.15 601.71,1966 646.05,2010.35 678.71,2010.35 915.51,2247.15 1030.21,2247.15 1037.21,2247.15 ccw(c1037.21,2253.65) 1043.71,2253.65 1043.71,2285.04 cw(c1059.21,2285.04) 1074.71,2285.04 1074.71,2213.91 ccw(c1081.21,2213.91) 1087.71,2213.91 1087.71,2285.04 cw(c1103.21,2285.04) 1118.71,2285.04 1118.71,2213.91 ccw(c1125.21,2213.91) 1131.71,2213.91 1131.71,2285.04 cw(c1147.21,2285.04) 1162.71,2285.04 1162.71,2213.91 ccw(c1169.21,2213.91) 1175.71,2213.91 1175.71,2285.04 cw(c1191.21,2285.04) 1206.71,2285.04 1206.71,2214.27 ccw(c1213.21,2214.27) 1219.71,2214.27 1219.71,2231.65 cw(c1235.21,2231.65) 1235.21,2247.15 1281.54,2247.15 1353.56,2247.15 1359.64,2241.07 1473.56,2127.15 1482.73,2127.15 1519.56,2090.32 1662.28,2090.32 1670.11,2098.15 v1(1670.71,2098.15)
  Bottom w5: v1(1670.71,2098.15) 1673.69,2098.15 1679,2092.83 1691.37,2092.83 1693.35,2094.81 1701.23,2094.81 1708.54,2102.13 HT1.B44@1735.12,2102.13
B13_L23_N: FEP1.C27 HT1.B34 | length 2438.5
  Top w5: FEP1.C27@390.71,1409.45 430.08,1409.45 435.45,1414.82 435.45,1417.77 438.38,1420.7 450.33,1420.7 458.48,1428.85 465.21,1428.85 v1(475.71,1418.35)
  SIG1 w5: v1(475.71,1418.35) 486.21,1428.85 553.94,1428.85 650.88,1525.79 861.01,1525.79 1043.58,1343.21 1087.71,1343.21 1094.71,1343.21 ccw(c1094.71,1357.21) 1108.71,1357.21 1108.71,1364.2 cw(c1113.71,1364.2) 1118.71,1364.2 1118.71,1311.56 ccw(c1132.71,1311.56) 1146.71,1311.56 1146.71,1364.2 cw(c1151.71,1364.2) 1156.71,1364.2 1156.71,1311.56 ccw(c1170.71,1311.56) 1184.71,1311.56 1184.71,1364.2 cw(c1189.71,1364.2) 1194.71,1364.2 1194.71,1311.56 ccw(c1208.71,1311.56) 1222.71,1311.56 1222.71,1357.33 cw(c1227.71,1357.33) 1232.71,1357.33 1232.71,1357.21 ccw(c1246.71,1357.21) 1246.71,1343.21 1309.71,1343.21 1507.92,1343.21 1545.71,1381 1591.91,1381 1641.79,1430.87 1641.79,1514.7 1735.79,1608.7 1735.79,1740.8 1652.07,1824.51 1652.07,1870.08 1658.14,1876.15 1662.28,1876.15 1670.28,1868.15 v1(1670.71,1868.15)
  Bottom w5: v1(1670.71,1868.15) 1671.14,1868.15 1676.5,1873.51 1676.5,1874.09 1679.43,1877.02 1683.57,1877.02 1687.38,1873.22 1701.23,1873.22 1708.54,1865.91 HT1.B34@1735.12,1865.91 HT1.B34@1738.85,1865.91
B13_L23_P: FEP1.C26 HT1.B35 | length 2433.7
  Top w5: FEP1.C26@390.71,1440.94 430.08,1440.94 435.45,1435.57 435.45,1432.63 438.38,1429.7 446.6,1429.7 454.75,1437.85 465.21,1437.85 v1(475.71,1448.35)
  SIG1 w5: v1(475.71,1448.35) 486.21,1437.85 550.21,1437.85 647.15,1534.79 755.17,1534.79 869.35,1534.79 982.42,1421.71 1007.32,1396.81 1051.92,1352.21 1087.71,1352.21 1094.71,1352.21 ccw(c1094.71,1357.21) 1099.71,1357.21 1099.71,1364.2 cw(c1113.71,1364.2) 1127.71,1364.2 1127.71,1311.56 ccw(c1132.71,1311.56) 1137.71,1311.56 1137.71,1364.2 cw(c1151.71,1364.2) 1165.71,1364.2 1165.71,1311.56 ccw(c1170.71,1311.56) 1175.71,1311.56 1175.71,1364.2 cw(c1189.71,1364.2) 1203.71,1364.2 1203.71,1311.56 ccw(c1208.71,1311.56) 1213.71,1311.56 1213.71,1357.33 cw(c1227.71,1357.33) 1241.71,1357.33 1241.71,1357.21 ccw(c1246.71,1357.21) 1246.71,1352.21 1309.71,1352.21 1504.19,1352.21 1541.98,1390 1588.18,1390 1632.79,1434.6 1632.79,1518.43 1726.79,1612.43 1726.79,1737.07 1643.07,1820.79 1643.07,1873.81 1654.41,1885.15 1662.28,1885.15 1670.28,1893.15 v1(1670.71,1893.15)
  Bottom w5: v1(1670.71,1893.15) 1672.01,1893.15 1679.14,1886.02 1687.3,1886.02 1691.1,1882.22 1701.23,1882.22 1708.54,1889.53 HT1.B35@1735.12,1889.53
B13_L24_N: HT1.B32
B13_L24_P: HT1.B33
B34_A8: HT2.A9
B34_A9: HT2.A11
B34_A10: HT2.A10
B34_B9: HT2.A8
B34_B10: HT2.A12
B34_C9: HT2.B10
B34_D9: HT2.B9
B34_G9: HT2.B11
B34_H11: HT2.B12
B34_J10: HT2.B6
B34_J11: HT2.B8
B34_K10: HT2.A7 R2.1 | length 131.4
  Bottom w10: R2.1@3375.08,1225 3378.19,1228.11 HT2.A7@3505.2,1228.11
B34_K11: HT2.B7 R1.1 | length 92.5
  Bottom w10: HT2.B7@3729.61,1228.11 3731.32,1226.4 3819,1226.4 R1.1@3820.71,1224.68
B35_L1_N: HT2.A18
B35_L3_N: HT2.A14
B35_L4_N: HT2.A16
B35_L5_P: HT2.A24
B35_L6_P: HT2.A26
B35_L19_P: HT2.A21
BTN0: HT2.A28
BTN1: HT1.A59
BTN2: HT2.A42
CORE1V5: HT2.A5 HT2.A6 HT2.B5 R1.2 | length 341
  Bottom w10: HT2.A6@3505.2,1204.49 HT2.A5@3505.2,1180.87 HT2.B5@3729.61,1180.87 3731.5,1182.76 3818.15,1182.76 R1.2@3820.71,1185.31
CORE1V8: HT2.B41 HT2.B42 | length 23.6
  Bottom w15: HT2.B41@3729.61,2031.26 HT2.B42@3729.61,2054.88
CORE_UART_N: HT3.B6
CORE_UART_P: HT3.B7
COREVADJ: HT1.B59 HT1.B60 | length 23.6
  Bottom w10: HT1.B59@1735.12,2456.46 HT1.B60@1735.12,2480.08
DC12V_IN: F1.2 J4.3 | length 855.9
  Top w60: J4.3@2340.71,3465.08 2341.38,3464.41 2341.38,3053.3 2376.52,3018.15 F1.2@2770.71,3018.15
ETH-LDL: HT2.B51 J2.12 | length 1916.4
  SIG1 w8: J2.12@3399.06,3795 3440.71,3753.35 3440.71,3320 3380.71,3260 3380.71,3125 3445.71,3060 3445.71,2500 3675.71,2270 v1(3815.71,2270)
  Bottom w8: HT2.B51@3729.61,2267.48 3730.87,2268.74 3814.45,2268.74 v1(3815.71,2270)
ETH-LDR: HT2.B50 J2.13 | length 1908.5
  SIG1 w8: J2.13@3720.71,3795 3650.71,3725 3650.71,3472.5 3737.4,3385.8 3737.4,3322.16 3865.71,3193.86 3865.71,2575.5 3865.71,2548 cw(c3857.71,2548) 3857.71,2540 3851.57,2540 ccw(c3851.57,2532) 3851.57,2524 3885.71,2524 cw(c3885.71,2516) 3885.71,2508 3845.71,2508 ccw(c3845.71,2500) 3845.71,2492 3857.71,2492 cw(c3857.71,2484) 3865.71,2484 3865.71,2480 3865.71,2280 3825.71,2240 v1(3815.71,2240)
  Bottom w8: HT2.B50@3729.61,2243.86 v1@3809.69,2243.86
ETH-TD0_N: HT2.B53 J2.3 | length 1303
  Bottom w8: J2.3@3434.88,3252.09 3424.93,3262.04 3424.93,3282.36 3424.52,3282.77 3424.52,3302.47 3419.83,3307.16 3413.21,3307.16 3387.71,3281.66 3387.71,2732.97 3438.19,2682.49 3445.23,2675.44 ccw(c3450.92,2681.07) 3456.57,2675.4 ; 3456.6,2675.44 cw(c3470.72,2661.27) 3484.86,2675.41 cw(c3470.72,2661.27) 3484.89,2647.15 ; 3484.88,2635.8 cw(c3490.52,2641.47) 3484.85,2647.12 ; 3484.89,2635.79 3518.6,2602.07 cw(c3514.38,2597.81) 3518.64,2602.04 3525.69,2594.99 3580.71,2539.97 3580.71,2370 3597.05,2353.66 3600.71,2350 3640.43,2310.28 3695.46,2310.28 3697.01,2311.83 3700.14,2311.83 3703.03,2314.72 HT2.B53@3729.61,2314.72
ETH-TD0_P: HT2.B52 J2.2 | length 1302.4
  Bottom w8: J2.2@3384.88,3352.09 3394.72,3342.25 3394.72,3313.78 3375.71,3294.77 3375.71,2728 3429.71,2674 3436.75,2666.96 ; 3436.79,2666.92 ccw(c3450.92,2681.07) 3465.03,2666.9 ; 3465.08,2666.94 cw(c3470.72,2661.27) 3476.36,2666.95 ; 3476.35,2655.58 ccw(c3490.52,2641.47) 3476.41,2627.3 3510.12,2593.59 ccw(c3514.38,2597.81) 3510.16,2593.55 3517.21,2586.5 3568.71,2535 3568.71,2365.03 3637.46,2296.28 3697.85,2296.28 3703.03,2291.1 HT2.B52@3729.61,2291.1 ; 3476.39,2655.63 ccw(c3470.72,2661.27) 3476.4,2666.91
ETH-TD1_N: HT2.B55 J2.7 | length 1291
  SIG1 w5: 3588.88,2413.73 3588.15,2413 3588.15,2407.95 3638.75,2357.35 3642.89,2357.35 3645.82,2360.28 3645.82,2360.85 3650.72,2365.75 v1(3650.72,2368.72)
  SIG1 w8: 3588.88,2413.73 3588.88,2470 3588.88,2487 cw(c3596.88,2487) 3596.88,2495 3598.38,2495 ccw(c3598.38,2501.5) 3598.38,2508 3595.38,2508 cw(c3595.38,2514.5) 3595.38,2521 3598.38,2521 ccw(c3598.38,2527.5) 3598.38,2534 3595.38,2534 cw(c3595.38,2540.5) 3595.38,2547 3598.38,2547 ccw(c3598.38,2553.5) 3598.38,2560 3595.38,2560 cw(c3595.38,2566.5) 3595.38,2573 3598.38,2573 ccw(c3598.38,2579.5) 3598.38,2586 3596.88,2586 cw(c3596.88,2594) 3588.88,2594 3588.88,2609.56 3589.32,2610 3589.32,2622.17 3589.32,2666.39 3560.71,2695 3560.71,2717.51 3560.71,2727.52 ccw(c3540.71,2727.52) 3540.71,2747.52 3535.71,2747.52 cw(c3535.71,2754.02) 3535.71,2760.52 3568.71,2760.52 ccw(c3568.71,2779.02) 3568.71,2797.52 cw(c3568.71,2805.52) 3560.71,2805.52 3560.71,2853 3560.71,3015 3589.1,3043.39 3589.1,3272 3593.79,3276.69 3600.41,3276.69 3625.02,3252.09 J2.7@3634.88,3252.09
  Bottom w5: v1(3650.72,2368.72) 3650.88,2368.72 3662.25,2357.35 3681.84,2357.35 3684.54,2354.66 3695.72,2354.66 3703.03,2361.97 HT2.B55@3729.61,2361.97 HT2.B55@3731.86,2361.97
ETH-TD1_P: HT2.B54 J2.4 | length 1290.1
  SIG1 w5: 3576.88,2410 3576.88,2406.5 3635.02,2348.35 3642.89,2348.35 3645.82,2345.43 3645.82,2345.19 3651.05,2339.96 v1(3651.05,2336.99)
  SIG1 w8: J2.4@3484.88,3352.09 3498.62,3352.09 3574.91,3275.8 3574.91,3046.17 3548.71,3019.97 3548.71,2853 3548.71,2805.52 ccw(c3568.71,2805.52) 3568.71,2785.52 cw(c3568.71,2779.02) 3568.71,2772.52 3535.71,2772.52 ccw(c3535.71,2754.02) 3535.71,2735.52 3540.71,2735.52 cw(c3540.71,2727.52) 3548.71,2727.52 3548.71,2717.51 3548.71,2690.03 3576.88,2661.86 3576.88,2410
  Bottom w5: v1@3647.21,2340.23 v1@3651.05,2340.23 ; v1(3651.05,2336.99) 3651.05,2337.15 3662.25,2348.35 3678.12,2348.35 3680.81,2345.66 3695.72,2345.66 3701.56,2339.82 HT2.B54@3728.13,2339.82
ETH-TD2_N: HT2.B57 J2.6 | length 1299.2
  Bottom w8: J2.6@3584.88,3352.09 3584.88,3295.93 3593.32,3287.49 3593.32,3148.61 3544.19,3099.49 3544.19,3024.75 3544.19,2973 cw(c3524.19,2973) 3524.19,2953 ccw(c3524.19,2945) 3524.19,2937 3544.52,2937 cw(c3544.52,2917) 3544.52,2897 3516.19,2897 ccw(c3516.19,2889) 3516.19,2881 3548.19,2881 cw(c3548.19,2861) 3548.19,2841 3516.19,2841 ccw(c3516.19,2833) 3516.19,2825 3524.19,2825 cw(c3524.19,2805) 3544.19,2805 3544.19,2795 3544.19,2661.51 3588.61,2617.1 3591.44,2614.27 3601.35,2604.35 ccw(c3609.2,2612.2) 3613.93,2602.16 3614.31,2602.34 cw(c3618.93,2597.77) 3623.52,2593.17 3623.33,2592.77 ccw(c3633.36,2588.04) 3625.52,2580.19 3632.88,2572.83 3635.71,2570 3663.48,2542.23 3663.48,2432.93 3687.2,2409.21 HT2.B57@3729.61,2409.21
ETH-TD2_P: HT2.B56 J2.5 | length 1296.9
  Bottom w8: J2.5@3534.88,3252.09 3570,3287.21 3576.63,3287.21 3581.32,3282.52 3581.32,3153.58 3532.19,3104.46 3532.19,3024.75 3532.19,2973 cw(c3524.19,2973) 3524.19,2965 ccw(c3524.19,2945) 3524.19,2925 3544.52,2925 cw(c3544.52,2917) 3544.52,2909 3516.19,2909 ccw(c3516.19,2889) 3516.19,2869 3548.19,2869 cw(c3548.19,2861) 3548.19,2853 3516.19,2853 ccw(c3516.19,2833) 3516.19,2813 3524.19,2813 cw(c3524.19,2805) 3532.19,2805 3532.19,2795 3532.19,2656.54 3580.43,2608.31 3649.47,2539.27 3649.47,2425.79 3683.86,2391.4 3697.22,2391.4 3703.03,2385.59 HT2.B56@3724.64,2385.59